# Altium PCB Rotary_pcb.PcbDoc
Units mil, origin at the board's own origin, x right, y up, seen from the top; angles counter-clockwise.
Board outline 1590 x 850 mil, 2 copper layers (Top Layer, Bottom Layer); 5 components, 38 nets, 17 pads, 0 vias.
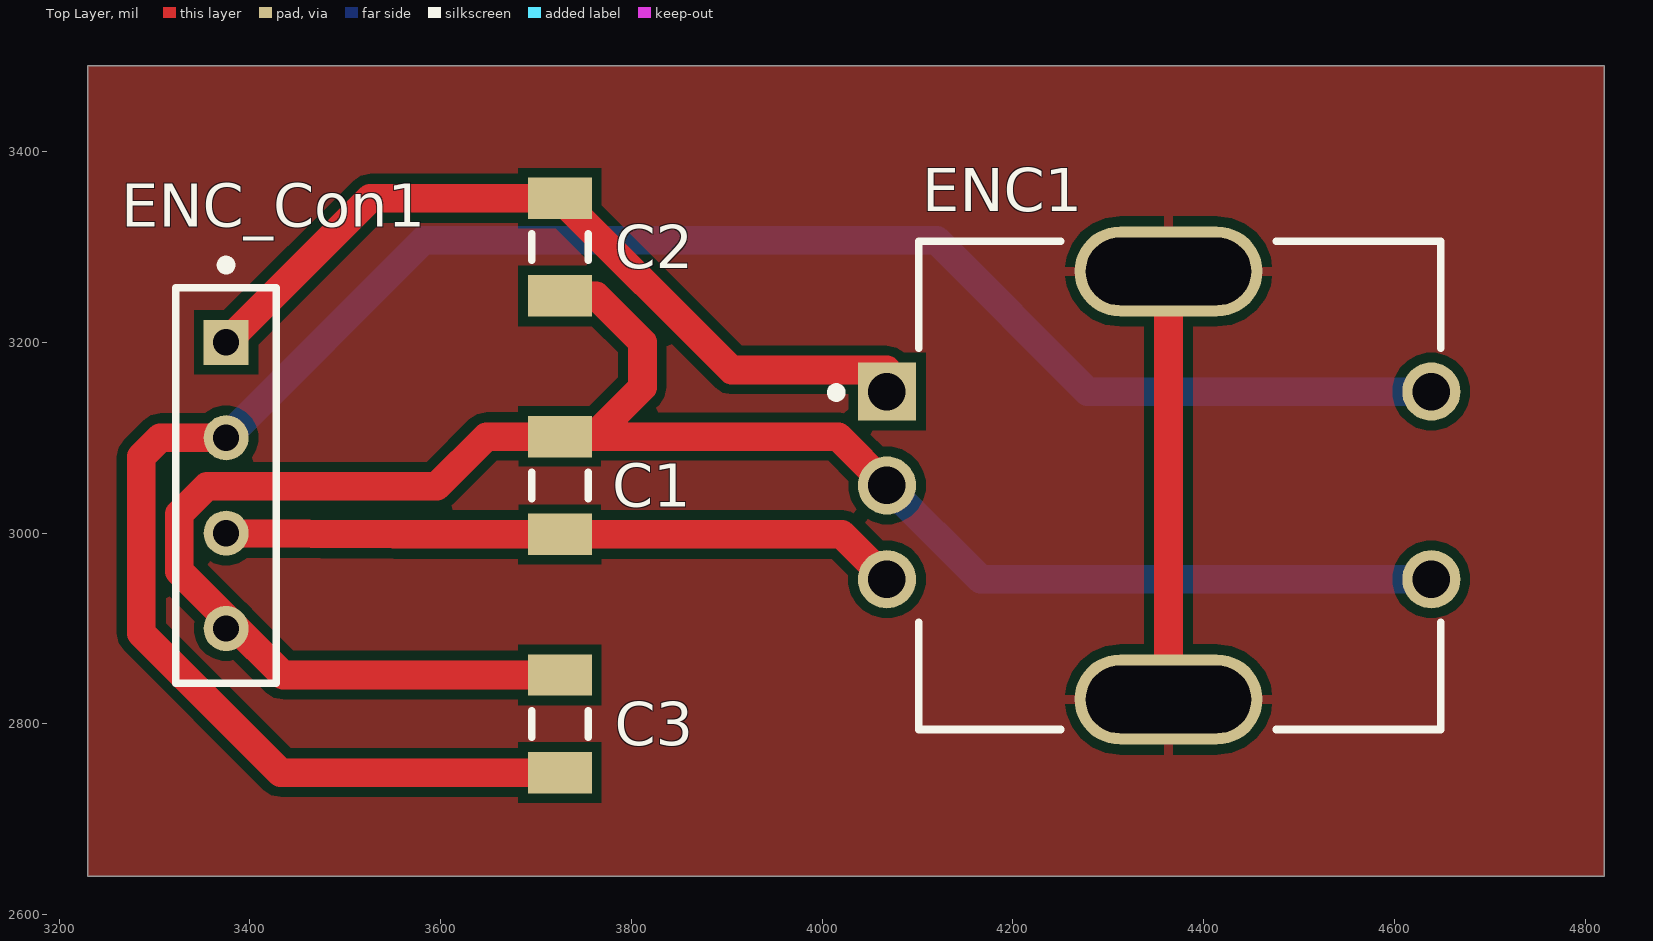
[diagram p0: Top Layer view]
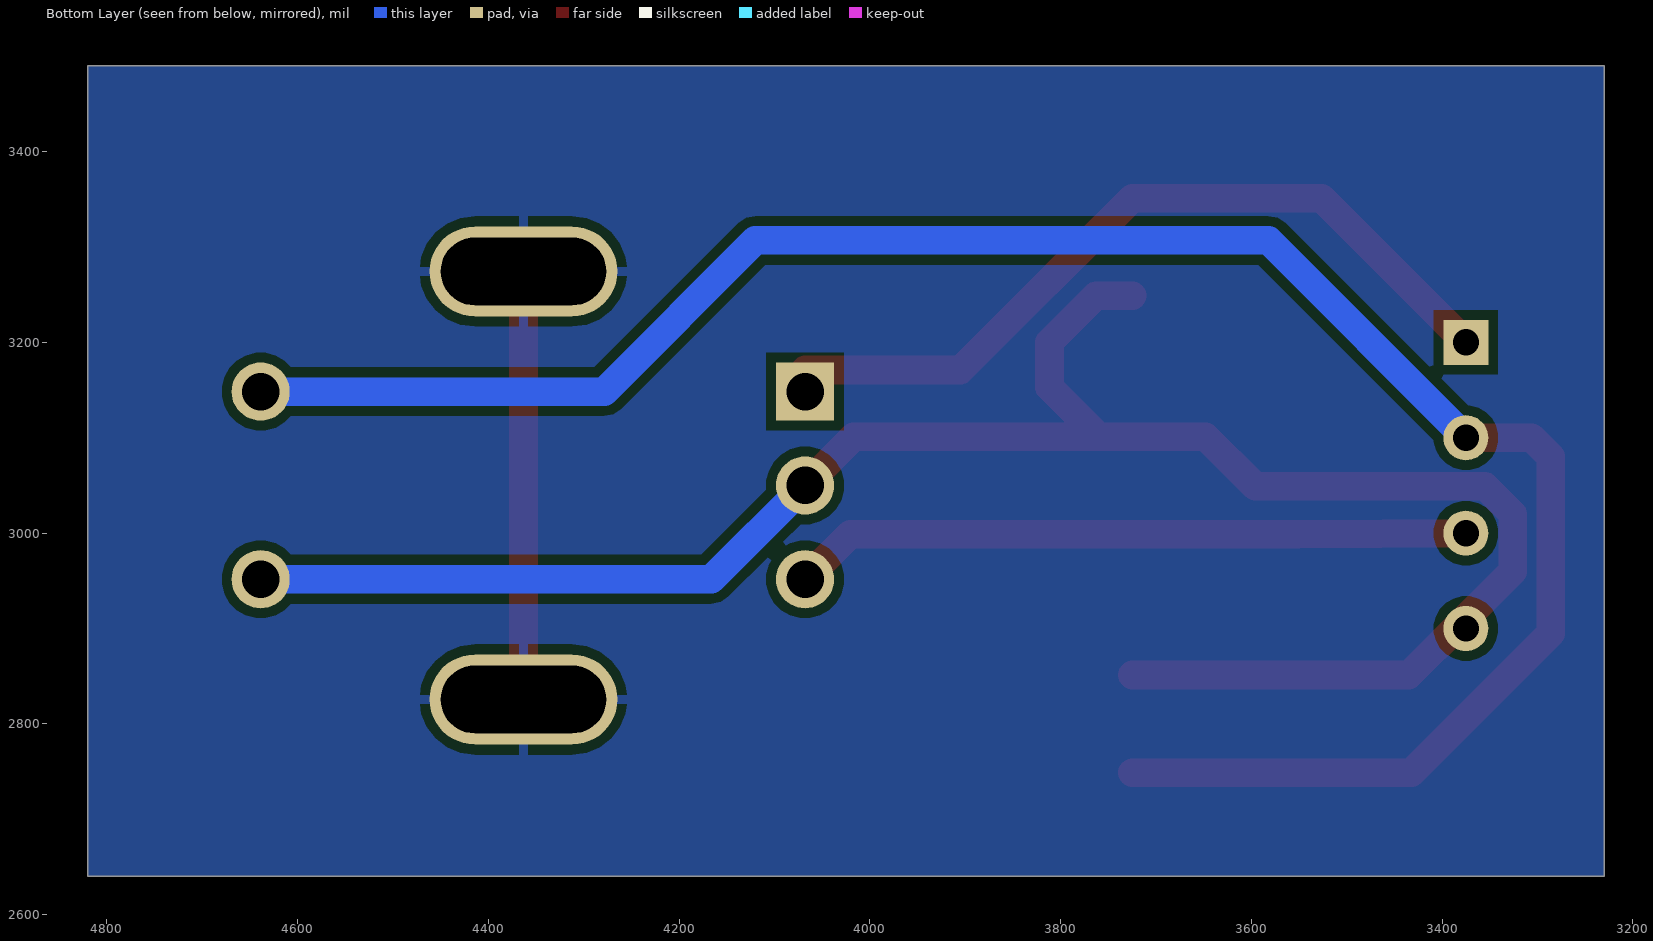
[diagram p1: Bottom Layer view, seen from below]

## Layer stack, top to bottom
Top Solder: solder mask 0.4, Solder Resist, Dk 3.5
Top Layer: signal copper 1.4
Dielectric 1: dielectric 12.6, FR-4, Dk 4.8
Bottom Layer: signal copper 1.4
Bottom Solder: solder mask 0.4, Solder Resist, Dk 3.5

## Board outline
3230,2640 4820,2640 4820,3490 3230,3490

## Design rules (kind name [scope] priority, off if disabled: settings)
Clearance [All] p1: gap=10 ignorepadtopadclearanceinfootprint=FALSE
HoleSize [All] p1: absolutevalues=TRUE maxlimit=200 minlimit=1 maxpercent=80.000 minpercent=20.000
PolygonConnect [All] p1: connectstyle=Relief reliefconductorwidth=10 reliefentries=4 polygonreliefangle="90 Angle" airgapwidth=10
RoutingVias [All] p1: holewidth=28 width=50 viastyle="Through Hole" minholewidth=28 minwidth=50 maxholewidth=28 maxwidth=50
SolderMaskExpansion [All] p1: expansion=4 istentingtop=FALSE
Width [All] p1: maxlimit=30 minlimit=10 preferedwidth=30 minimp=50.000000 maximp=50.000000 favimp=50.000000
29 further rules are at their usual default settings.

## Components (designator, comment, footprint, x,y, rotation, side; value= is the part's Value field where it differs from the comment)
C1 "100n" Capacitor_1206 3725,3050 r90 top
C2 "100n" Capacitor_1206 3725,3300 r90 top
C3 "100n" Capacitor_1206 3725,2800 r90 top
ENC1 "PEC11R-4230F-S0024" Rotary_Encoder_PEC11R-4230F-S0024 4375,3050 r270 top
ENC_Con1 "" Header-Female-JST_4pin 3375,3050 r270 top (schematic designator Rotary_Encoder_1)

## Footprints (in the part's own frame and the unit in brackets; to place one, negate y for a bottom-side part, rotate by r counter-clockwise, add the part's x,y. Pads: shape width x height; smd on the part's side, far side on the other; paste and mask are expansions set on the pad)
Capacitor_1206 [mm] "SMD, 2-Leads, Body 3.4x1.8mm, IPC High Density"
  rect 1.1x1.7 smd: 1(-1.3,0) 2(1.3,0)
  silkscreen extent -0.35,-0.75 0.35,0.75, body extent -1.7,-0.9 1.7,0.9, height 0.88
Header-Female-JST_4pin [mm]
  rect 1.2x1.2 hole 0.7 paste-2539.97 mask+0: 1(-3.81,0)
  round 1.2 hole 0.7 paste-2539.97 mask+0: 2(-1.27,0) 3(1.27,0) 4(3.81,0)
  silkscreen extent -5.99,-1.34 5.27,1.34, body extent -5.37,-1.44 5.37,1.44, height 0.25
Rotary_Encoder_PEC11R-4230F-S0024 [mm]
  round 1.55 hole 1 paste-2539.97 mask+0: 1(-2.5,6.7) 2(2.5,6.7) B(2.5,-7.8) C(0,-7.8)
  rrect100% 2.4x5 hole 4.4 slot 1.8 at 0 deg paste-2539.97 mask+0: 3(-5.7,-0.3) 4(5.7,-0.3)
  rect 1.55x1.55 hole 1 paste-2539.97 mask+0: A(-2.5,-7.8)
  silkscreen extent -6.5,-9.27 6.5,6.95, body extent -7,-8.67 7,7.57, height 0.25

## Part data
C1 C2 C3: library part Capacitor_1206, "CAP, Ceramic, 0.1 uF, +/- 10%, 50 V, -55 to 125 degC, 1206 (3216 Metric), RoHS, Tape and Reel", Capacitance=0.1µF, Capacitance Tolerance=±10%, Capacitor Case Style=1206[3216Metric], Dielectric Characteristic=X7R, Manufacturer=Kemet, Operating Temperature Max=125degC, Operating Temperature Min=-55degC, Package Description="2-Leads SMD, Body 3.2 x 1.6 mm", Package Reference=1206-2, Voltage Rating=50V, Datasheet URL=https://datasheet.ciiva.com/6125/1725438-6125494.pdf, Datasheet Version=Jul-13, Manufacturer URL=http://www.kemet.com/, Packaging=Tape&Reel, Product Range=KEMET-CSeries, SVHC=ToBeAdvised
ENC1: library part Rotary_Encoder_PEC11R-4230F-S0024, "ROTARY ENCODER MECHANICAL 24PPR", Max Operating Temperature=70°C, Min Operating Temperature=-30°C, Package Quantity=75, Built in Switch=Yes, Detent=Yes, Encoder Type=Mechanical, Height=13.4mm, Hole Diameter=1.8mm, Length=36.5mm, Mount="Through Hole", Number of Channels=2, Orientation=Vertical, Output Type=Quadrature, Packaging=Bulk, Pulses per Revolution=24, REACH SVHC="No SVHC", RoHS Compliant=Yes, Series=PEC11R, Termination="PC Pin", Width=12.5mm
ENC_Con1: library part Header-Female-JST_4pin, Color=Black, Contact Resistance=10mR, Max Current Rating=1A, Max Operating Temperature=125°C, Min Operating Temperature=-55°C, Package Quantity=1, Connector Type=Receptacle, Contact Material=Copper, Contact Plating=Gold, Depth=2.54mm, Gender=Female, Housing Color=Black, Housing Material=Polyester, Lead Free="Lead Free", Length=10.16mm, Mount="Through Hole", Number of Contacts=4, Number of Positions=4, Number of Rows=1, Orientation=Straight, Packaging=Bulk, Pitch=2.54mm, Radiation Hardening=No, RoHS Compliant=Yes, Series=SS, Termination=Solder, Width=2.54mm

## Nets (pads, with @x,y where several pads share a name; then routed paths per layer and width w, separated by ;. In a path a pad name is that pad's centre, name@x,y a point inside that pad or via, vN(x,y) a via of type N, cw(c..) or ccw(c..) an arc to the next point about the centre after c; other vN are vias at no path point)
GND: ENC1.3 ENC1.4 | length 448.8
  Top Layer w30: ENC1.4 ENC1.3
Net3_1: 
Net5mm_connector_24V_2: 
Net*_5: 
Net*_6: 
Net*_7: 
Net*_8: 
Net*_9: 
Net*_10: 
Net*_11: 
Net*_13: 
Net*_15: 
Net*_16: 
Net*_17: 
Net*_18: 
Net*_21: 
NetBrightness_2: 
NetC1_1: C1.1 ENC1.B ENC_Con1.3 | length 712.5
  Top Layer w30: ENC_Con1.3 3551.18,2998.82 C1.1 4020.67,2998.82 ENC1.B
NetC1_2: C1.2 C2.1 C3.2 ENC1.2 ENC1.C ENC_Con1.4 | length 2147.3
  Top Layer w30: ENC_Con1.4 ENC_Con1.4@3380.5,2905.5 ; C3.2 3573.82,2851.18 3434.82,2851.18 ENC_Con1.4@3380.5,2905.5 ; C2.1 3762.84,3248.82 3811.66,3200 3811.66,3152.84 3760,3101.18 ; ENC1.C 4016.73,3101.18 3760,3101.18 ; ENC_Con1.4@3380.5,2905.5 3326,2960 3326,3020 3355,3049 3595.82,3049 3648,3101.18 C1.2 3760,3101.18
  Bottom Layer w30: ENC1.C 4166.34,2951.57 ENC1.2
NetC2_2: C2.2 ENC1.A ENC_Con1.1 | length 852.7
  Top Layer w30: ENC_Con1.1 3526.18,3351.18 C2.2 3905.18,3171 4067.91,3171 ENC1.A
NetC3_1: C3.1 ENC1.1 ENC_Con1.2 | length 2197
  Top Layer w30: ENC_Con1.2 3306,3100 3286,3080 3286,2895 3432.18,2748.82 C3.1
  Bottom Layer w30: ENC_Con1.2 3582,3307 4120,3307 4278.57,3148.43 ENC1.1
NetC4_1: 
NetC5_2: 
NetCalibration_1: 
NetCalibration_3: 
NetContrast_2: 
NetD1_2: 
NetD2_1: 
NetL1_2: 
NetNPN1_2: 
NetNPN1_3: 
NetNPN2_2: 
NetNPN2_3: 
NetPCB_Con_1_1: 
NetPCB_Con_1_3: 
NetPCB_CON_2_1: 
NetPCB_CON_2_2: 
NetR1_2: 

## Polygon pours and split planes (outlines as drawn)
GND on Top Layer "GND_L01_P000" (solid, pour order 0): 3230,3490 4820,3490 4820,2640 3230,2640
GND on Bottom Layer "GND_L02_P001" (solid, pour order 1): 3230,3490 4820,3490 4820,2640 3230,2640